# Allegro board LAUNCHPAD.brd
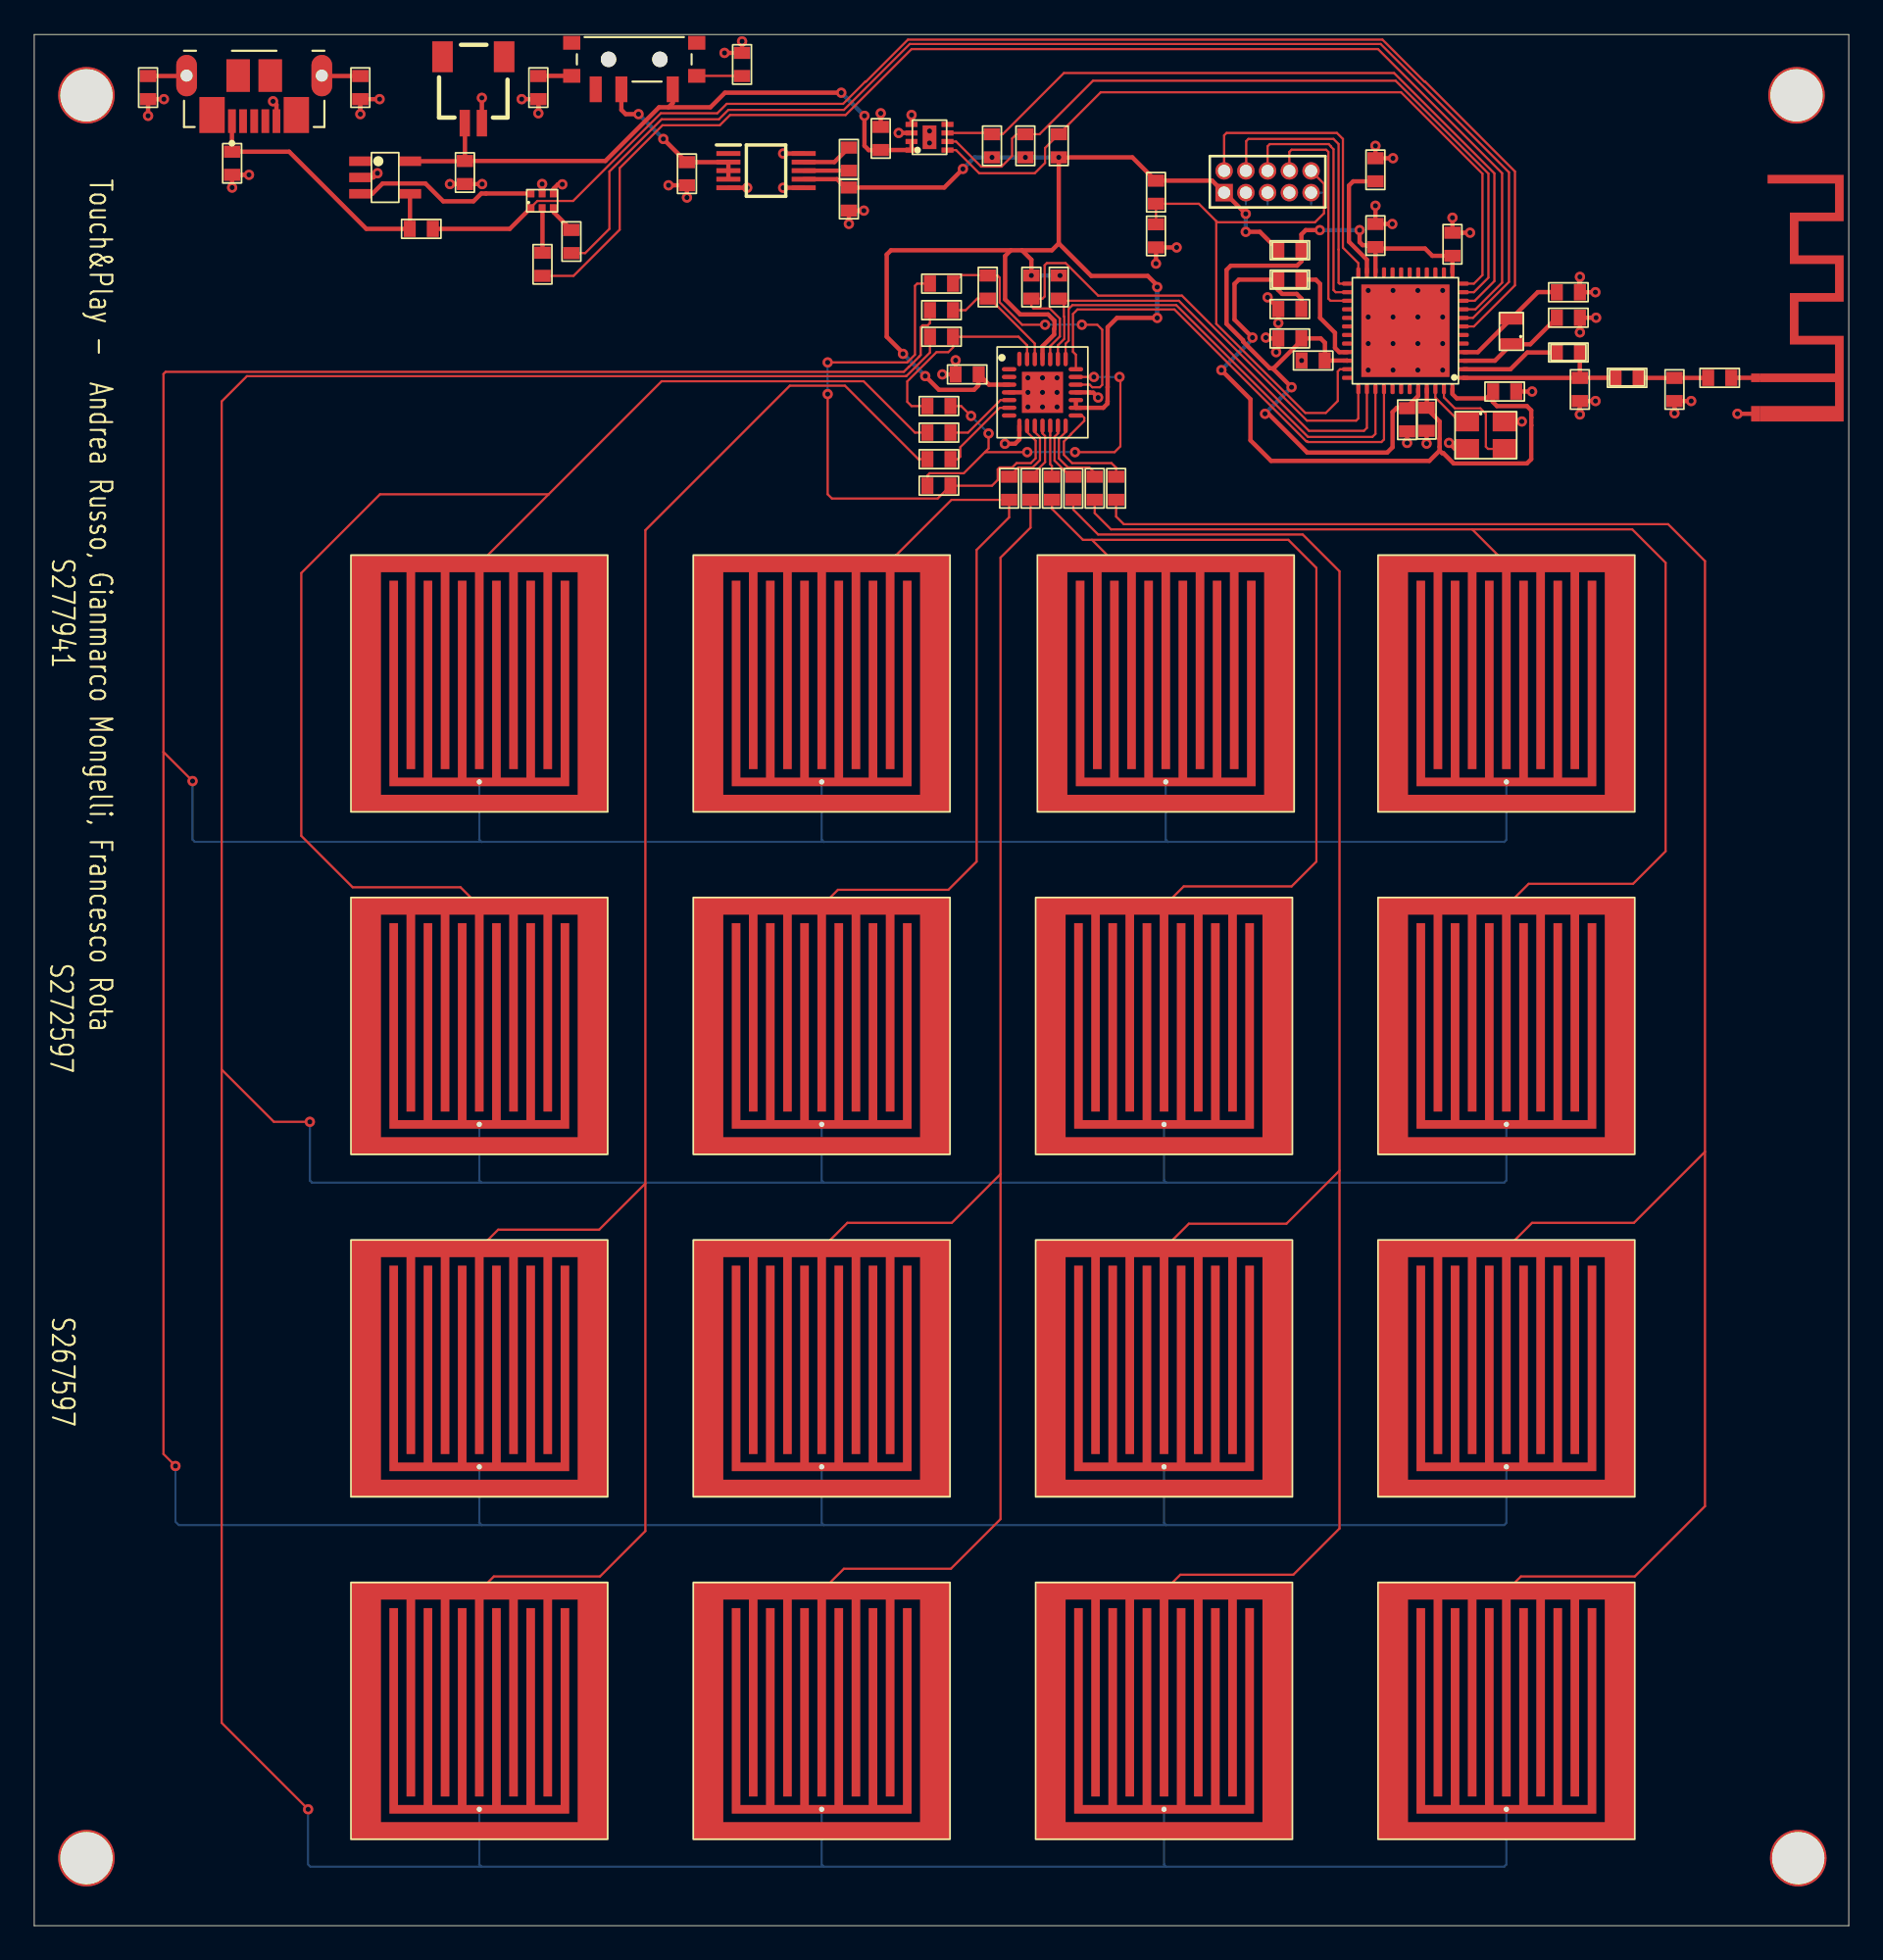
[diagram p0: board, top side]
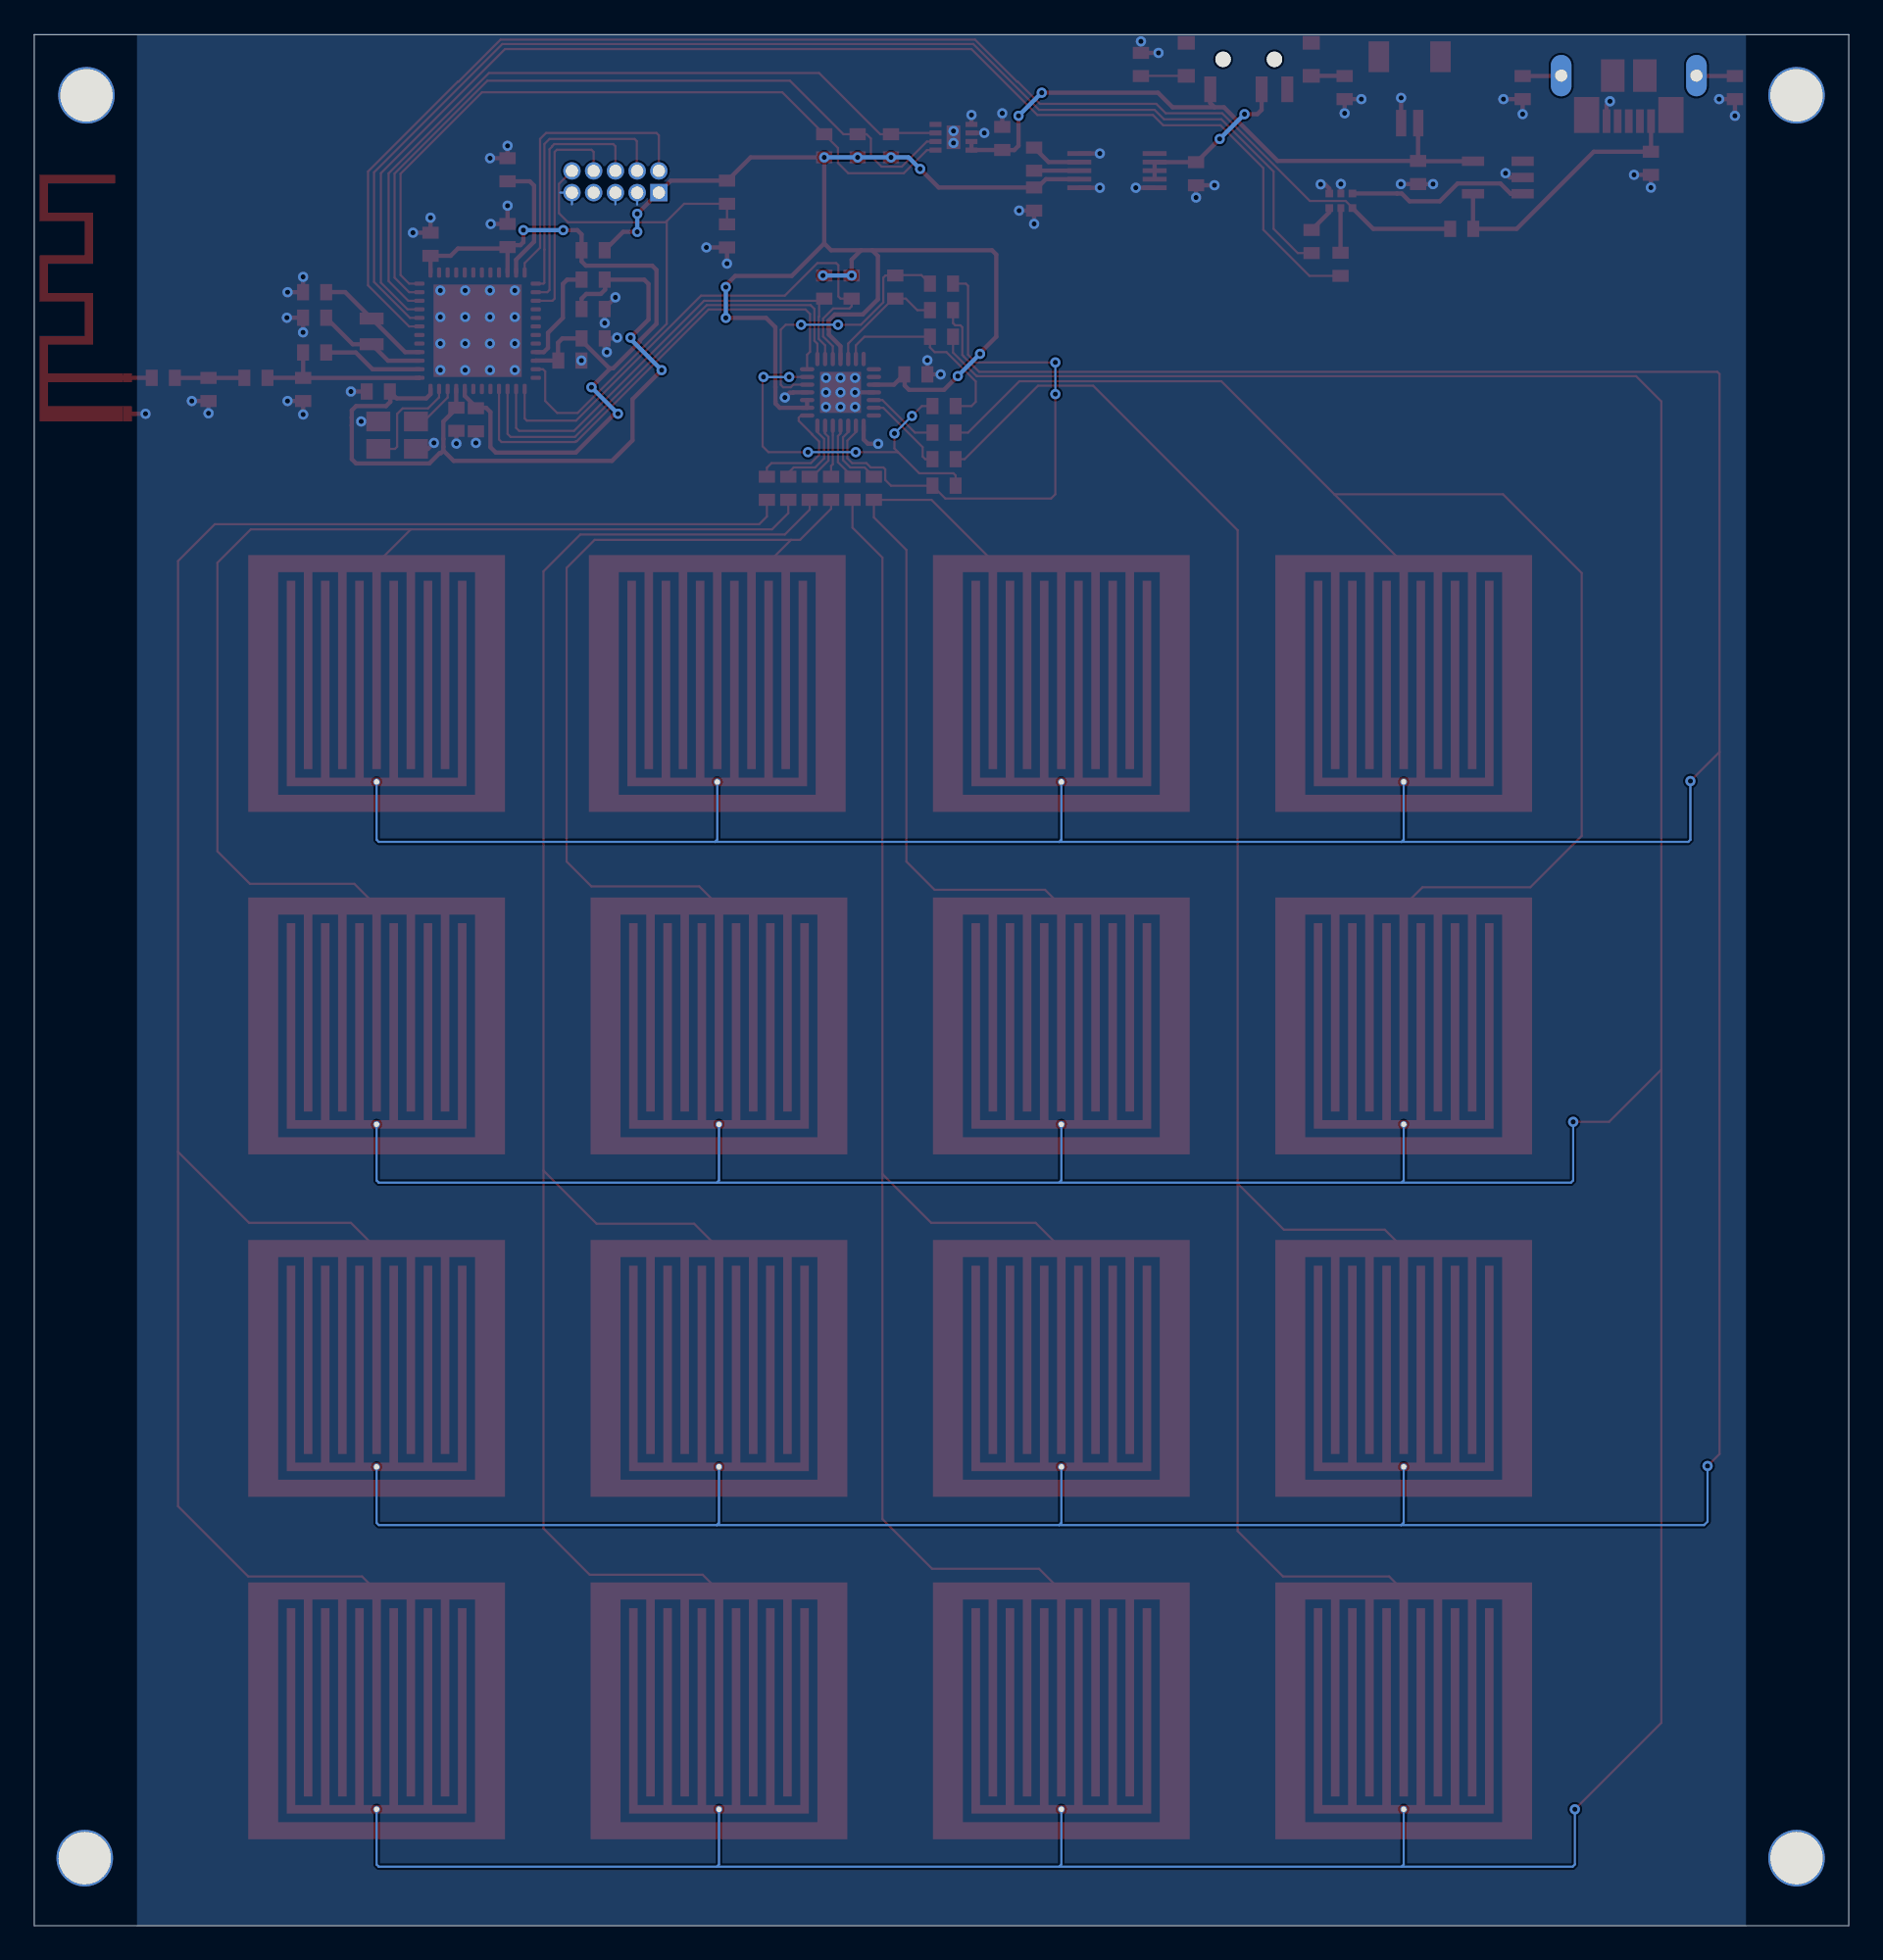
[diagram p1: board, bottom side, seen from below]

Outline 106 x 110.45 mm; copper layers: TOP, BOTTOM. Coordinates in mm from the lower left corner of the outline.
Outline path: 0,110.45 0,0 106,0 106,110.45 0,110.45

## Design rules (mm)
constraint set DEFAULT: min track width 0.127

## Placement (name value [footprint] x y rotation side)
A1  TI AN043  [AN043_PATCH_ANTENNA]  100.8 87.35 270 top
B1  QMatrix_Button  [QMATRIX_BUTTON_TOP]  46 72.55 0 top
B2  QMatrix_Button  [QMATRIX_BUTTON_TOP]  46 32.55 0 top
B3  QMatrix_Button  [QMATRIX_BUTTON_TOP]  66.1 72.55 0 top
B4  QMatrix_Button  [QMATRIX_BUTTON_TOP]  66 32.55 0 top
B5  QMatrix_Button  [QMATRIX_BUTTON_TOP]  86 72.55 0 top
B6  QMatrix_Button  [QMATRIX_BUTTON_TOP]  86 32.55 0 top
B7  QMatrix_Button  [QMATRIX_BUTTON_TOP]  26 72.55 0 top
B8  QMatrix_Button  [QMATRIX_BUTTON_TOP]  26 32.55 0 top
B9  QMatrix_Button  [QMATRIX_BUTTON_TOP]  46 52.55 0 top
B10  QMatrix_Button  [QMATRIX_BUTTON_TOP]  46 12.55 0 top
B11  QMatrix_Button  [QMATRIX_BUTTON_TOP]  66 52.55 0 top
B12  QMatrix_Button  [QMATRIX_BUTTON_TOP]  66 12.55 0 top
B13  QMatrix_Button  [QMATRIX_BUTTON_TOP]  86 52.55 0 top
B14  QMatrix_Button  [QMATRIX_BUTTON_TOP]  86 12.55 0 top
B15  QMatrix_Button  [QMATRIX_BUTTON_TOP]  26 52.55 0 top
B16  QMatrix_Button  [QMATRIX_BUTTON_TOP]  26 12.55 0 top
C1  12pF  [0603_C]  89.62 93.91 180 top
C2  12pF  [0603_C]  89.62 95.4 180 top
C3  1uF  [0603_C]  78.35 102.55 270 top
C4  100nF  [0603_C]  82.85 98.2 270 top
C5  100nF  [0603_C]  80.2 87.95 90 top
C6  10uF  [0603_C]  73.35 94.42 0 top
C7  100nF  [0603_C]  81.34 87.98 90 top
C8  100nF  [0603_C]  85.9 89.6 180 top
C9  100nF  [0603_C]  78.35 98.71 270 top
C10  100nF  [0603_C]  74.71 91.41 0 top
C11  10uF  [0603_C]  73.35 92.7 0 top
C12  12pF  [0603_C]  98.46 90.4 0 top
C13  1.2pF  [0603_C]  90.29 89.72 90 top
C14  1.2pF  [0603_C]  95.82 89.72 90 top
C15  100nF  [0603_C]  65.53 98.69 90 top
C16  330nF  [0603_C]  47.59 103.17 90 top
C17  100nF  [0603_C]  49.45 104.38 270 top
C18  10uF  [0603_C]  38.13 102.32 90 top
C19  10uF  [0603_C]  47.59 100.84 90 top
C20  1u  [0603_C]  25.16 102.39 90 top
C21  1u  [0603_C]  11.56 102.93 90 top
C22  100nF  [0603_C]  54.5 90.6 180 top
C23  4.7 nF  [0603_C]  55.7 95.7 270 top
C24  4.7 nF  [0603_C]  52.85 88.75 180 top
IC1  SC20S-7PF20PPM  [SMD_SC20S-7PF20PPM]  86.29 93.11 90 top
J1  FTSH-105-01-L-D-RA-K  [SAMTEC_FTSH-105-01-L-D-K]  72.05 101.85 0 top
J2  1051640001  [MOLEX_105164-0001]  12.85 109.5 180 top
J3  -  [SM02B-SRSS-TBLFSN]  25.65 107.25 180 top
L1  BLM18EG121SH1D  [0603_L]  73.35 97.85 0 top
L2  10uH  [0603_L]  73.35 96.13 180 top
L3  15nH  [0603_L]  89.62 91.88 0 top
L4  2nH  [0603_L]  93.05 90.4 0 top
LED1  SMLP36  [SMD_SMLP36]  29.67 100.74 0 top
NOREF  -  [unnamed]  103.05 3.95 0 top
NOREF#2  -  [unnamed]  3.05 106.9 0 top
NOREF#3  -  [unnamed]  102.95 106.9 0 top
NOREF#4  -  [unnamed]  3.05 3.95 0 top
R1  100kOhm  [0603_R]  65.53 101.24 90 top
R2  3.3kOhm  [0603_R]  59.85 103.95 270 top
R3  3.3kOhm  [0603_R]  57.9 103.95 270 top
R4  3.3kOhm  [0603_R]  55.95 103.95 270 top
R5  240 Ohm  [0603_R]  22.61 99.1 180 top
R6  33kOhm  [0603_R]  29.45 107.35 90 top
R7  33kOhm  [0603_R]  41.35 108.7 270 top
R8  33k  [0603_R]  19.05 107.35 270 top
R9  270 Ohm  [0603_R]  29.69 97.03 90 top
R10  82 Ohm  [0603_R]  31.38 98.36 90 top
R11  33k  [0603_R]  6.65 107.35 270 top
R13  3.3kOhm  [0603_R]  58.25 95.7 90 top
R14  3.3kOhm  [0603_R]  59.85 95.7 90 top
R15  1kOhm  [0603_R]  52.85 85.65 180 top
R16  1kOhm  [0603_R]  52.85 87.2 180 top
R17  1kOhm  [0603_R]  63.2 83.95 270 top
R18  1kOhm  [0603_R]  61.95 83.95 270 top
R19  1kOhm  [0603_R]  60.7 83.95 270 top
R20  1kOhm  [0603_R]  59.45 83.95 270 top
R21  1kOhm  [0603_R]  58.2 83.95 270 top
R22  1kOhm  [0603_R]  56.95 83.95 270 top
R23  1kOhm  [0603_R]  53 94.35 180 top
R24  1kOhm  [0603_R]  53 92.8 180 top
R25  1MOhm  [0603_R]  52.85 84.1 180 top
R26  1MOhm  [0603_R]  53 95.9 0 top
SW1  PCM12SMTR  [SW_PCM12SMTR]  35.05 109 180 top
U1  TI-CC2640  [SMD_CC2640R2F_RGZ_48]  80.1 93.15 180 top
U2  MAX1759  [SMD_MAX1759]  42.75 102.5 0 top
U3  MAX17048  [SMD_MAX17048]  52.3 104.45 270 top
U4  MAXIM MAX1555  [SMD_MAX1555]  20.5 102.1 270 top
U5  AT42QT2160  [QFN45P400X400X90-29N-D]  58.9 89.55 0 top
Y1  TSX-3225240000MF15X-AC3  [SMD_TSX-3225240000MF15X-AC3]  84.8 87.05 0 top

## Library data of the parts
A1 = Antenna
B1-B16 = QMatrix_Button
C1-C24 = C
IC1 = SC20S-7PF20PPM
J1 = FTSH-105-01-L-D-RA-K
J2 = 1051640001
J3 = SM02B-SRSS-TBLFSN
L1 = FerriteBead
L2-L4 = L
LED1 = SMLP36
R1-R11 R13-R26 = R
SW1 = PCM12SMTR
U1 = TI-CC2640
U2 = MAX1759
U3 = MAX17048
U4 = MAX1555
U5 = AT42QT2160
Y1 = TSX-3225240000MF15X-AC3

## Footprints (pads in the part's own frame, mm; a bottom-side part is the same pattern mirrored in y, then rotated)
0603_C
  rect 0.7x0.95 smd: 1(-0.675,0) 2(0.675,0)
0603_L
  rect 0.7x0.95 smd: 1(-0.675,0) 2(0.675,0)
0603_R
  rect 0.7x0.95 smd: 1(-0.675,0) 2(0.675,0)
AN043_PATCH_ANTENNA
  rect 0.9x0.5 smd: 1(-0.95,-0.25)
  rect 0.5x0.5 smd: 2(-3.05,-0.25)
MOLEX_105164-0001
  rect 0.45x1.38 smd: 1(1.3,4.11) 2(0.65,4.11) 3(0,4.11) 4(-0.65,4.11) 5(-1.3,4.11)
  oval 1.208x2.416 hole 0.7: 6(-3.95,1.45) 11(3.95,1.45)
  rect 1.475x2.1 smd: 7(-2.462,3.75) 10(2.462,3.75)
  rect 1.375x1.9 smd: 8(-0.938,1.45) 9(0.938,1.45)
QFN45P400X400X90-29N-D
  rrect 0.85x0.25 smd: 1(-1.95,1.35) 2(-1.95,0.9) 3(-1.95,0.45) 4(-1.95,0) 5(-1.95,-0.45) 6(-1.95,-0.9) 7(-1.95,-1.35) 15(1.95,-1.35) 16(1.95,-0.9) 17(1.95,-0.45) 18(1.95,0) 19(1.95,0.45) 20(1.95,0.9) 21(1.95,1.35)
  rrect 0.25x0.85 smd: 8(-1.35,-1.95) 9(-0.9,-1.95) 10(-0.45,-1.95) 11(0,-1.95) 12(0.45,-1.95) 13(0.9,-1.95) 14(1.35,-1.95) 22(1.35,1.95) 23(0.9,1.95) 24(0.45,1.95) 25(0,1.95) 26(-0.45,1.95) 27(-0.9,1.95) 28(-1.35,1.95)
  rect 2.4x2.4 smd: 29(0,0)
QMATRIX_BUTTON_TOP
  round 0.5 smd: 1(0,7)
  round 0.4 hole 0.3: 2(0,-5.75)
SAMTEC_FTSH-105-01-L-D-K
  rect 1.016x1.016 hole 0.711: 1(-2.54,-0.635)
  round 1.016 hole 0.711: 2(-2.54,0.635) 3(-1.27,-0.635) 4(-1.27,0.635) 5(0,-0.635) 6(0,0.635) 7(1.27,-0.635) 8(1.27,0.635) 9(2.54,-0.635) 10(2.54,0.635)
SM02B-SRSS-TBLFSN
  rect 0.6x1.55 smd: 1(-0.5,1.975) 2(0.5,1.975)
  rect 1.2x1.8 smd: 3(-1.8,-1.9) 4(1.8,-1.9)
SMD_CC2640R2F_RGZ_48
  rrect 0.6x0.24 smd: 1(-3.4,2.75) 2(-3.4,2.25) 3(-3.4,1.75) 4(-3.4,1.25) 5(-3.4,0.75) 6(-3.4,0.25) 7(-3.4,-0.25) 8(-3.4,-0.75) 9(-3.4,-1.25) 10(-3.4,-1.75) 11(-3.4,-2.25) 12(-3.4,-2.75) 25(3.4,-2.75) 26(3.4,-2.25) 27(3.4,-1.75) 28(3.4,-1.25) 29(3.4,-0.75) 30(3.4,-0.25) 31(3.4,0.25) 32(3.4,0.75) 33(3.4,1.25) 34(3.4,1.75) 35(3.4,2.25) 36(3.4,2.75)
  rrect 0.24x0.6 smd: 13(-2.75,-3.4) 14(-2.25,-3.4) 15(-1.75,-3.4) 16(-1.25,-3.4) 17(-0.75,-3.4) 18(-0.25,-3.4) 19(0.25,-3.4) 20(0.75,-3.4) 21(1.25,-3.4) 22(1.75,-3.4) 23(2.25,-3.4) 24(2.75,-3.4)
  rrect 0.6x0.24 smd rot 90.2: 37(2.75,3.4) 38(2.25,3.4) 39(1.75,3.4) 40(1.25,3.4) 41(0.75,3.4) 42(0.25,3.4) 43(-0.25,3.4) 44(-0.75,3.4) 45(-1.25,3.4) 46(-1.75,3.4) 47(-2.25,3.4) 48(-2.75,3.4)
  rect 5.15x5.4 smd: 49(0,0)
SMD_MAX1555
  rect 0.55x1.3 smd: 1(-0.95,-1.45) 2(0,-1.45) 3(0.95,-1.45) 4(0.95,1.45) 5(-0.95,1.45)
SMD_MAX1759
  rect 1.4x0.28 smd: 1(-2.2,1) 2(-2.2,0.5) 3(-2.2,0) 4(-2.2,-0.5) 5(-2.2,-1) 6(2.2,-1) 7(2.2,-0.5) 8(2.2,0) 9(2.2,0.5) 10(2.2,1)
SMD_MAX17048
  rect 0.3x0.7 smd: 1(0.75,-1.05) 2(0.25,-1.05) 3(-0.25,-1.05) 4(-0.75,-1.05) 5(-0.75,1.05) 6(-0.25,1.05) 7(0.25,1.05) 8(0.75,1.05)
  rect 1.38x0.8 smd: 9(0,0)
SMD_SC20S-7PF20PPM
  rect 0.7x1.4 smd: 1(-0.75,0) 2(0.75,0)
SMD_SMLP36
  rect 0.45x0.45 smd: 1(-0.675,-0.425) 3(0.675,-0.425) 4(0.675,0.425) 6(-0.675,0.425)
  rect 0.4x0.45 smd: 2(0,-0.425) 5(0,0.425)
SMD_TSX-3225240000MF15X-AC3
  rect 1.4x1.15 smd: 1(-1.1,0.8) 2(1.1,0.8) 3(1.1,-0.8) 4(-1.1,-0.8)
SW_PCM12SMTR
  round 0.9 hole 0.9 unplated: (-1.5,0) (1.5,0)
  rect 0.7x1.5 smd: 1(-2.25,1.75) 2(0.75,1.75) 3(2.25,1.75)
  rect 1x0.8 smd: S1(-3.65,0.965) S2(-3.65,-0.965) S3(3.65,-0.965) S4(3.65,0.965)
unnamed
  round 3.302 hole 3.048: (0,0)

## Nets
GND_SIGNAL: A1.1(-) C1.1 C2.1 C3.1 C4.1 C5.1 C6.1 C7.1 C8.1 C9.1 C10.1 C11.1 C13.1 C14.1 C15.1 C17.1 C18.1 C19.1 C20.1 C21.1 C22.2 J1.3 J1.5 J1.9 J2.5 J3.1 LED1.4 LED1.5(CR) R6.1 R7.1 R8.2 R11.2 U1.49 U2.5 U2.6 U2.10 U3.3 U3.4 U3.9 U4.2 U5.4 U5.8 U5.18 U5.29 Y1.2 Y1.4
VDD: C19.2 C22.1 J1.1 L1.1 R1.2 R2.2 R3.2 R4.2 R13.2 R14.2 U2.7 U5.3 U5.16 U5.17 U5.25
VDDR: C6.2 C7.2 C8.2 L2.2 U1.45 U1.48
VDDS: C4.2 C5.2 C9.2 C10.2 C11.2 L1.2(B) U1.13 U1.22 U1.34 U1.44
ALRTN_17048: R2.1 U1.12 U3.8
BAT+: C17.2 C20.2 J3.2 SW1.1 U3.1(VDD) U3.2 U4.5
DCDC_SW: L2.1 U1.33
DCOUPL: C3.2 U1.23
I2CA0_QT2160: U1.40 U5.21
I2CA1_QT2160: U1.39 U5.22
LED_BLUE: LED1.1 R5.1 U1.7
LED_GREEN: R10.1 U1.8
LED_RED: R9.1 U1.9
RF_ANTENNA: A1.2 C12.2
RF_N: L3.1 U1.2
RF_P: C13.2 L3.2 L4.1 U1.1
RST: C15.2 J1.10 R1.1 U1.35
SCL_17048: R4.1 U1.10 U3.6
SCL_QT2160: R13.1 U1.37 U5.24
SDA_17048: R3.1 U1.11 U3.7
SDA_QT2160: R14.1 U1.38 U5.23
SW_OUT: C18.2 SW1.2 U2.2(SHDN_N) U2.3 U2.4
TCKC: J1.4 U1.25
TDI: J1.8 U1.27
TDO: J1.6 U1.26
TMSC: J1.2 U1.24
X0: B1.1 B9.1 R22.2
X1: B2.1 B10.1 R21.2
X2: B3.1 B11.1 R20.2
X3: B4.1 B12.1 R19.2
X4: B5.1 B13.1 R18.2
X5: B6.1 B14.1 R17.2
X6: B7.1 B15.1 R16.2
X7: B8.1 B16.1 R15.2
Y0: B1.2(Y) B2.2(Y) B3.2(Y) B4.2(Y) B5.2(Y) B6.2(Y) B7.2(Y) B8.2(Y) R23.2
Y1: B9.2(Y) B10.2(Y) B11.2(Y) B12.2(Y) B13.2(Y) B14.2(Y) B15.2(Y) B16.2(Y) R24.2
N01048: C16.1 U2.8
N01939: C21.2 J2.1(VBUS) R5.2 U4.4
N007970: C16.2 U2.9
N09779: R15.1 U5.6
N09783: R16.1 U5.5
N09795: R17.1 U5.15
N09799: R18.1 U5.14
N09803: R19.1 U5.13
N09807: R20.1 U5.12
N09811: R21.1 U5.11
N09815: R22.1 U5.10
N11484: C23.2 R23.1 U5.26
N11551: C23.1 R26.2 U5.19
N11691: C24.2 R24.1 U5.27
N11716: C24.1 R25.2 U5.20(Y1B)
N11800: R25.1 R26.1 U5.9
N16165: U1.47 Y1.3
N16180: U1.46 Y1.1
N16326: C1.2 IC1.1 U1.3
N16335: C2.2 IC1.2 U1.4(X32K_Q2)
N20124: LED1.6 U4.3
N20418: LED1.3 R10.2
N20445: LED1.2 R9.2
N41051: R7.2 SW1.S1
N47314: C12.1 C14.2 L4.2
N72888: J2.6 R8.1
N72942: J2.11 R11.1
N408580: R6.2 SW1.S4(SHIELD_4)

Pads without a net: J1 7; J2 2 3 4 7 8 9 10; J3 3 4; SW1 3 S2 S3; U1 5 6 14 15 16 17 18 19 20 21 28 29 30 31 32 36 41 42 43; U2 1; U3 5; U4 1; U5 1 2 7 28

## Via types
v1: diameter 0.6, hole 0.3, TOP to BOTTOM, 121 vias

## Routing (per net, layer and track width the routed paths; a pad name or vN(x,y) marks a point on that pad's centre or on a via; arc(x,y) is an arc through that point)
GND_SIGNAL: length 57.7
  TOP w0.25: v1(66.73,98.02) C15.1 v1(65.53,97.07) ; v1(82.65,86.6) 83,86.25 Y1.4 ; 29.67,101.16 v1(29.67,101.72) ; v1(12.55,102.25) 11.56,102.25 v1(11.56,101.51) ; v1(30.85,101.7) 30.59,101.7 30.34,101.45 30.34,101.16 ; U5.8 57.55,86.8 57.3,86.55 v1(56.7,86.55) ; v1(40.33,109.38) R7.1 v1(41.35,110.05) ; v1(90.29,88.26) C13.1 v1(91.2,89.05) ; v1(79.38,103.22) C3.1 v1(78.35,103.95) ; v1(28.48,106.67) R6.1 v1(29.45,105.85) ; v1(91.2,95.4) 90.3,95.4 v1(90.3,96.29) ; v1(47.59,99.39) C19.1 v1(48.47,100.16) ; v1(72.05,95.1) 72.67,94.47 C6.1 v1(72.67,93.6) ; v1(79.34,99.38) 78.35,99.38 v1(78.35,100.45) ; C5.1 v1(80.2,86.6) ; v1(37.05,101.64) C18.1 v1(38.13,100.93) ; v1(13.95,106.55) 14.15,106.35 J2.5 ; A1.1 v1(99.5,88.3) ; v1(62.15,89.25) 61.87,89.53 61.68,89.53 61.66,89.55 U5.18 ; v1(72.55,91.9) 72.67,92.03 C11.1 72.15,92.7 72.1,92.75 v1(71.95,92.75) ; U3.4 v1(51.25,105.75) ; v1(96.8,89.05) C14.1 v1(95.82,88.33) ; U2.10 v1(43.75,103.5) ; U2.6 v1(43.75,101.5) ; Y1.2 v1(86.9,87.85) ; U3.3 v1(50.5,104.7) ; J3.1 v1(26.15,106.75) ; C17.1 v1(49.45,105.85) ; v1(83.88,98.88) C4.1 v1(82.85,99.75) ; v1(7.58,106.67) R11.2 v1(6.65,105.7) ; v1(26.16,101.72) v1(24.29,101.72) ; v1(20.17,106.67) R8.2 v1(19.05,105.8) ; v1(53.83,91.42) C22.2 v1(53.05,90.6) ; v1(90.3,93.06) 90.3,93.91 v1(91.24,93.91) ; C8.1 v1(87.5,89.6) ; U5.4 v1(58.05,89.55) ; U2.5 v1(41.65,101.5) ; U4.2 19.8,102.1 v1(20.05,102.35) ; C7.1 v1(81.34,86.56)
  BOTTOM w0.127: 74.59,100.53 J1.9 75.28,101.22 ; 72.05,100.53 J1.5 ; 70.78,100.53 J1.3
  vias: v1(52.3,104.81) v1(52.3,104.11) v1(58.05,90.4) v1(58.05,88.7) v1(58.9,90.4) v1(58.9,89.55) v1(58.9,88.7) v1(59.75,90.4) v1(59.75,89.55) v1(59.75,88.7) v1(74.03,91.41) v1(77.93,95.5) v1(77.93,93.95) v1(77.93,92.4) v1(77.93,90.85) v1(79.38,95.5) v1(79.38,93.95) v1(79.38,92.4) v1(79.38,90.85) v1(80.83,95.5) v1(80.83,93.95) v1(80.83,92.4) v1(80.83,90.85) v1(82.28,95.5) v1(82.28,93.95) v1(82.28,92.4) v1(82.28,90.85)
VDD: length 92.1
  TOP w0.25: 57.7,97.85 57.05,97.85 ; 57.7,97.85 58.25,97.3 v1(58.25,96.38) ; 57.7,97.85 59.45,97.85 59.85,98.25 ; 57.05,97.85 50.05,97.85 49.8,97.6 49.8,92.8 50.75,91.85 v1(50.75,91.8) ; 57.05,97.85 56.72,97.52 56.72,94.98 57.6,94.1 59.23,94.1 59.6,93.73 59.6,93.27 59.58,93.25 59.58,92.93 58.9,92.25 U5.25 ; v1(65.6,93.9) 63.25,93.9 62.71,93.36 62.71,89.86 62.7,89.86 62.7,89.02 62.7,89.02 62.7,88.9 62.45,88.65 U5.16 U5.17 ; U5.3 55.77,90 C22.1 55.15,90.57 55.15,89.95 54.9,89.7 52.85,89.7 v1(52.05,90.5) ; L1.1 71.6,98.92 v1(70.78,98.92) ; U2.7 46.9,102 47.39,101.52 C19.2 53.16,101.52 v1(54.25,102.6) ; v1(65.6,95.7) 65.6,95.8 65.05,96.35 61.75,96.35 59.85,98.25 ; 59.85,98.25 v1(59.85,103.28) 64.15,103.28 65.51,101.91 R1.2 68.81,101.91 J1.1 69.53,101.22 v1(70.78,99.97)
  BOTTOM w0.25: v1(52.05,90.5) v1(50.75,91.8) ; v1(59.85,103.28) v1(57.9,103.28) v1(55.95,103.28) 54.92,103.28 v1(54.25,102.6) ; v1(70.78,99.97) v1(70.78,98.92) ; v1(65.6,93.9) v1(65.6,95.7) ; v1(58.25,96.38) v1(59.92,96.38)
VDDR: length 46.8
  TOP w0.25: C8.2 85.2,89.57 ; 85.2,89.57 84.83,89.2 83.1,89.2 82.85,89.45 U1.48 ; 85.2,89.57 85.2,89 85.45,88.75 87.2,88.75 87.45,88.5 87.45,88.08 87.45,88.08 87.45,87.62 87.45,87.62 87.45,85.65 87.2,85.4 82.92,85.4 82.32,86 82.25,86 82.1,86.15 ; 82.1,86.15 82.1,86.37 82.1,86.37 82.1,86.83 82.1,86.83 82.1,87.85 81.34,88.61 C7.2 81.35,88.66 U1.45 ; 82.1,86.15 81.5,85.55 72.25,85.55 71.05,86.75 71.05,89.15 v1(69.35,90.85) ; 74.03,94.42 74.03,95.03 73.75,95.3 72.9,95.3 72.65,95.55 72.65,96.11 L2.2 70.37,96.13 70.12,95.88 70.12,93.8 v1(71.17,92.75)
  BOTTOM w0.25: v1(69.35,90.85) 71.17,92.67 v1(71.17,92.75)
VDDS: length 48.5
  TOP w0.25: 72.4,90.95 74.03,92.58 74.03,92.7 75.15,92.7 75.4,92.45 75.4,91.42 C10.2 76.69,91.41 U1.34 ; 72.4,90.95 72.4,90.9 v1(73.45,89.85) ; 72.4,90.95 72.18,90.95 70.61,92.52 70.61,92.59 69.65,93.56 69.65,96.7 69.9,96.95 73.78,96.95 74.03,97.2 74.03,98.78 74.28,99.03 v1(75.1,99.03) ; C9.2 78.23,98.15 77.6,98.15 77.42,98.32 v1(77.42,99.03) ; C9.2 U1.22 ; C9.2 78.44,97.95 81.25,97.95 81.67,97.53 C4.2 U1.13 ; U1.44 80.85,89.35 80.2,88.7 C5.2 80.17,88.65 79.6,88.65 79.35,88.4 79.35,86.35 79.03,86.03 74.37,86.03 72.1,88.3 v1(71.9,88.3)
  BOTTOM w0.25: v1(73.45,89.85) v1(71.9,88.3) ; v1(75.1,99.03) v1(77.42,99.03)
ALRTN_17048: length 43.5
  TOP w0.127: U3.8 53.85,103.7 55.2,102.35 58.45,102.35 59.05,102.95 59.05,103.82 62.3,107.07 79.84,107.07 84.6,102.32 84.6,96.4 84.1,95.9 U1.12
BAT+: length 37.2
  TOP w0.25: U3.2 U3.1 51.24,103.7 C17.2 49.45,103.7 48.75,103.7 48.5,103.95 v1(48.5,105.7) ; SW1.1 37.3,106.45 37.05,106.2 ; C20.2 33.36,103.06 36.5,106.2 37.05,106.2 ; C20.2 25.14,103.05 U4.5 ; C20.2 25.16,105.27 J3.2 ; 37.05,106.2 39.5,106.2 40.35,107.05 v1(47.14,107.05)
  BOTTOM w0.25: v1(47.14,107.05) 47.15,107.05 v1(48.5,105.7)
DCDC_SW: length 6.1
  TOP w0.25: 74.03,96.13 74.87,96.13 75.12,95.88 75.12,93.9 75.99,93.03 75.99,92.15 76.24,91.9 U1.33
DCOUPL: length 7.2
  TOP w0.25: U1.23 77.85,97.3 76.8,98.35 76.8,101.62 77.05,101.88 C3.2
I2CA0_QT2160: length 27.8
  TOP w0.127: U5.21 60.85,91.75 60.68,91.92 60.68,94.13 60.94,94.39 66.61,94.39 74.3,86.7 74.35,86.7 74.4,86.65 78.7,86.65 78.85,86.8 U1.40
I2CA1_QT2160: length 26.9
  TOP w0.127: U5.22 60.25,92.39 60.43,92.57 60.43,94.43 60.65,94.65 66.71,94.65 74.41,86.95 78.17,86.95 78.35,87.13 U1.39
LED_BLUE: length 81.6
  TOP w0.127: LED1.1 29,100.33 29.39,100.73 31.48,100.73 36.6,105.85 39.9,105.85 40.45,106.4 47.25,106.4 48.55,107.7 48.59,107.7 51.04,110.15 78.76,110.15 81.21,107.7 81.25,107.7 86.5,102.45 86.5,95.8 84.1,93.4 U1.7
  TOP w0.25: R5.1 27.78,99.1 LED1.1
LED_GREEN: length 74.8
  TOP w0.127: R10.1 32.19,97.69 33.6,99.1 33.6,102.45 36.65,105.5 40,105.5 40.55,106.05 47.3,106.05 51.15,109.9 78.65,109.9 86.15,102.4 86.15,96 84.05,93.9 U1.8
LED_RED: length 75.9
  TOP w0.127: R9.1 31.5,96.35 34.2,99.05 34.2,102.65 36.7,105.15 40.05,105.15 40.65,105.75 47.4,105.75 51.25,109.6 78.5,109.6 85.75,102.35 85.75,95.96 84.19,94.4 U1.9
RF_ANTENNA: length 1.8
  TOP w0.25: C12.2 A1.2 100.9,90.4
RF_N: length 5.9
  TOP w0.25: U1.2 86.24,90.9 87.22,91.88 L3.1
RF_P: length 10.4
  TOP w0.25: 90.29,90.39 90.3,90.4 L4.1 ; 90.29,90.39 90.29,91.88 90.3,91.88 ; 90.29,90.39 83.5,90.39 U1.1
RST: length 32.3
  TOP w0.127: 74.59,102.48 75.35,101.73 75.35,100.01 74.82,99.48 69.12,99.48 69.05,99.55 ; 69.05,99.55 69.05,93.56 74.26,88.35 75.45,88.35 76.15,89.05 76.15,90.77 76.28,90.9 U1.35 76.69,90.89 ; 69.05,99.55 68.03,100.56 R1.1 C15.2
SCL_17048: length 44.5
  TOP w0.127: U3.6 55.88,104.7 55.95,104.62 56.58,104.62 60.15,108.2 79.44,108.2 85.3,102.34 85.3,96.05 84.15,94.9 U1.10
SCL_QT2160: length 31.6
  TOP w0.127: U5.24 59.35,92.25 59.92,92.82 59.92,93.86 59.33,94.45 58.38,94.45 58.25,94.58 R13.1 58.9,95.03 59.02,95.15 59.02,96.97 59.15,97.1 60.25,97.1 62.15,95.2 67.05,95.2 74.35,87.9 77.22,87.9 77.35,88.03 U1.37
SDA_17048: length 45
  TOP w0.127: U3.7 53.85,104.2 55.32,102.73 56.5,102.73 57.12,103.36 57.12,104.38 57.38,104.62 58.73,104.62 61.85,107.75 79.53,107.75 84.95,102.33 84.95,96.25 84.1,95.4 U1.11
SDA_QT2160: length 27.2
  TOP w0.127: U1.38 77.85,87.48 77.68,87.3 74.46,87.3 66.87,94.9 59.98,94.9 ; 59.98,94.9 R14.1 ; 59.98,94.9 60.15,94.72 60.15,93.99 60.17,93.96 60.17,92.67 59.8,92.3 U5.23
SW_OUT: length 9.7
  TOP w0.25: U2.4 U2.3 U2.2 40.55,103 C18.2 38.11,103 v1(36.75,104.35) ; v1(35.3,105.8) 34.55,105.8 34.3,106.05 SW1.2
  BOTTOM w0.25: v1(36.75,104.35) v1(35.3,105.8)
TCKC: length 15.9
  TOP w0.127: U1.25 76.25,95.9 76.2,95.95 76.2,97.89 76.2,97.89 76.2,104.05 75.9,104.35 70.93,104.35 70.8,104.22 70.8,102.5 70.78,102.48
TDI: length 13.2
  TOP w0.127: 73.32,102.48 73.32,103.59 73.45,103.72 75.47,103.72 75.6,103.59 75.6,95.03 75.73,94.9 U1.27
TDO: length 14.6
  TOP w0.127: U1.26 76.03,95.4 75.9,95.53 75.9,103.75 75.75,103.9 75.75,103.92 75.62,104.05 72.18,104.05 72.05,103.92 72.05,102.48
TMSC: length 17.4
  TOP w0.127: U1.24 77.35,97.1 76.45,98 76.45,104.35 76.1,104.7 69.65,104.7 69.51,104.56 69.51,102.48
X0: length 44.5
  TOP w0.127: B9.1 46.95,60.5 53.4,60.5 55.05,62.15 55.05,80.35 56.95,82.25 R22.2 53.58,83.28 49.86,79.55 B1.1
X1: length 84.7
  TOP w0.127: 56.45,43.9 56.45,23.75 53.55,20.85 47.3,20.85 B10.1 ; 56.45,43.9 53.6,41.05 47.5,41.05 B2.1 ; 56.45,43.9 56.45,79.9 58.2,81.65 R21.2
X2: length 49.4
  TOP w0.127: B11.1 67.15,60.7 73.45,60.7 74.9,62.15 74.9,79.3 73.26,80.94 61.79,80.94 ; B3.1 63.18,79.55 61.79,80.94 ; 61.79,80.94 61.26,80.94 59.45,82.75 R20.2
X3: length 97.4
  TOP w0.127: B12.1 66.95,20.5 73.55,20.5 76.25,23.2 76.25,44.1 ; 76.25,44.1 73.15,41 67.45,41 B4.1 ; 76.25,44.1 76.25,79.1 74.1,81.25 62.15,81.25 60.7,82.7 R19.2
X4: length 65.6
  TOP w0.127: 84,81.55 B5.1 ; 84,81.55 62.9,81.55 61.95,82.5 R18.2 ; 84,81.55 93.35,81.55 95.3,79.6 95.3,62.75 93.4,60.85 87.3,60.85 B13.1
X5: length 119.2
  TOP w0.127: 97.6,45.2 93.45,41.05 87.5,41.05 B6.1 ; 97.6,45.2 97.6,79.7 95.45,81.85 63.65,81.85 63.2,82.3 R17.2 ; 97.6,45.2 97.6,24.5 93.5,20.4 86.85,20.4 B14.1
X6: length 75.9
  TOP w0.127: 30.05,83.6 36.65,90.2 48.45,90.2 51.45,87.2 R16.2 ; 30.05,83.6 20.2,83.6 15.6,79 15.6,63.65 18.6,60.65 24.9,60.65 B15.1 ; 30.05,83.6 B7.1 26,79.8
X7: length 102.6
  TOP w0.127: 35.7,43.35 35.7,23.05 33.05,20.4 26.85,20.4 B16.1 ; 35.7,43.35 35.7,81.5 44.14,89.94 47.36,89.94 51.65,85.65 R15.2 ; 35.7,43.35 33,40.65 27.1,40.65 B8.1
Y0: length 303.3
  TOP w0.127: 7.55,68.55 7.55,27.55 v1(8.25,26.85) ; 7.55,68.55 7.55,90.62 7.68,90.75 50.8,90.75 51.1,91.05 51.11,91.05 51.7,91.64 51.7,91.65 51.78,91.73 51.78,93.35 51.9,93.47 52.2,93.47 52.33,93.59 R23.2 ; 7.55,68.55 v1(9.25,66.85)
  BOTTOM w0.127: B8.2 26,23.55 26.15,23.4 ; 66.13,23.4 85.87,23.4 86,23.53 B6.2 ; 66.13,23.4 46.13,23.4 ; 66.13,23.4 66,23.53 B4.2 ; B3.2 66.1,63.43 66.23,63.3 ; 46.13,23.4 46,23.53 B2.2 ; 46.13,23.4 26.15,23.4 ; 26.13,63.3 9.38,63.3 9.25,63.43 v1(9.25,66.85) ; 26.13,63.3 26,63.43 B7.2 ; 26.13,63.3 46.13,63.3 ; 66.23,63.3 85.87,63.3 86,63.43 B5.2 ; 66.23,63.3 46.13,63.3 ; 26.15,23.4 8.45,23.4 8.25,23.6 v1(8.25,26.85) ; 46.13,63.3 46,63.43 B1.2
Y1: length 308.1
  TOP w0.127: 10.95,50 10.95,89.02 12.42,90.5 50.91,90.5 50.91,90.5 50.95,90.5 52.33,91.88 R24.2 ; 10.95,50 10.95,11.85 v1(16,6.8) ; 10.95,50 14,46.95 v1(16.1,46.95) ; B11.2 65.95,46.75
  BOTTOM w0.127: B11.2 66,43.53 66.13,43.4 ; B13.2 86,43.53 85.87,43.4 66.13,43.4 ; 46.13,43.4 46,43.53 B9.2 ; 46.13,43.4 26.13,43.4 ; 46.13,43.4 66.13,43.4 ; 46.13,3.45 46,3.58 B10.2 ; 46.13,3.45 66.13,3.45 ; 46.13,3.45 26.13,3.45 ; v1(16,6.8) 16,3.58 16.13,3.45 26.13,3.45 ; B14.2 86,3.58 85.87,3.45 66.13,3.45 ; 66.13,3.45 66,3.58 B12.2 ; 26.13,43.4 26,43.53 B15.2 ; 26.13,43.4 16.23,43.4 16.1,43.53 v1(16.1,46.95) ; 26.13,3.45 26,3.58 B16.2
N01048: length 2.6
  TOP w0.25: C16.1 47.59,102.5 U2.8
N01939: length 16.1
  TOP w0.25: J2.1 11.55,103.61 C21.2 14.9,103.6 19.4,99.1 R5.2 21.95,99.11 U4.4
N007970: length 3
  TOP w0.25: 47.59,103.84 46.74,103 U2.9
N09779: length 5
  TOP w0.127: 53.52,85.65 53.95,85.65 54.1,85.8 54.1,86.35 56.4,88.65 U5.6
N09783: length 4.2
  TOP w0.127: 53.52,87.2 54.55,87.2 56.45,89.1 U5.5
N09795: length 7.1
  TOP w0.127: U5.15 61.21,88.2 61.34,88.07 61.34,87.89 60.57,87.12 60.57,87.1 60.15,86.68 60.15,85.9 60.63,85.42 62.93,85.42 63.2,85.15 R17.1
N09799: length 4.7
  TOP w0.127: U5.14 60.25,87.23 59.86,86.84 59.86,85.69 60.38,85.17 61.63,85.17 61.95,84.85 R18.1
N09803: length 3.6
  TOP w0.127: R19.1 60.54,84.62 59.6,85.57 59.6,86.95 59.81,87.16 59.81,87.59 U5.13
N09807: length 3
  TOP w0.127: U5.12 59.35,87.45 59.35,87.05 59.35,85.35 59.45,85.25 R20.1
N09811: length 3.4
  TOP w0.127: U5.11 58.9,87.15 59.05,87 59.05,85.47 R21.1
N09815: length 4.3
  TOP w0.127: R22.1 57.49,85.17 58.32,85.17 58.75,85.59 58.75,86.93 58.45,87.23 U5.10
N11484: length 7
  TOP w0.127: R23.1 54.41,94.35 55.09,95.03 C23.2 55.83,95.03 58.45,92.4 U5.26
N11551: length 16
  TOP w0.127: v1(61.2,93.5) 62.1,93.5 62.39,93.21 62.39,89.99 62.25,89.85 61.81,89.85 61.66,90 U5.19 ; v1(59.05,93.5) 57.71,93.5 56.4,94.81 56.4,96.25 56.27,96.38 C23.1 55.67,96.4 54.17,96.4 R26.2
  BOTTOM w0.127: v1(59.05,93.5) v1(61.2,93.5)
N11691: length 11.9
  TOP w0.127: U5.27 58,92.3 57.5,92.8 R24.1 53.67,92.17 53.4,91.9 52.71,91.9 51,90.19 51,89 51.25,88.75 C24.2
N11716: length 23.3
  TOP w0.127: v1(60.8,86.06) 63.11,86.06 63.45,86.4 63.45,90.4 v1(63.4,90.45) ; v1(54.73,88.17) 54.15,88.75 53.52,88.75 ; v1(55.75,87.15) 55.75,86.28 55.55,86.07 ; 55.55,86.07 54.3,84.82 52.3,84.82 52.17,84.7 R25.2 ; 55.55,86.07 55.57,86.06 v1(58.01,86.06) ; v1(61.9,90.45) U5.20
  BOTTOM w0.127: v1(54.73,88.17) v1(55.75,87.15) ; v1(58.01,86.06) v1(60.8,86.06) ; v1(63.4,90.45) v1(61.9,90.45)
N11800: length 33.6
  TOP w0.127: R26.1 51.58,95.9 51.45,95.77 51.45,91.75 51,91.3 v1(46.35,91.3) ; v1(46.35,89.45) 46.35,83.6 46.6,83.35 52.77,83.35 53.52,84.1 55.95,84.1 56.28,84.44 56.28,85.05 56.4,85.17 57.13,85.17 57.39,85.42 58.22,85.42 58.5,85.7 58.5,86.73 58,87.23 U5.9
  BOTTOM w0.127: v1(46.35,89.45) v1(46.35,91.3)
N16165: length 6.4
  TOP w0.127: Y1.3 84.93,86.25 84.8,86.38 84.8,88.29 84.48,88.62 82.99,88.62 82.35,89.26 U1.47
N16180: length 2.9
  TOP w0.127: U1.46 81.85,89.25 83.25,87.85 Y1.1
N16326: length 6.5
  TOP w0.25: U1.3 85.33,91.4 IC1.1 87.39,92.36 C1.2
N16335: length 6.9
  TOP w0.25: U1.4 84.33,91.9 IC1.2 87.84,95.41 88.94,95.41 C2.2
N20124: length 10.8
  TOP w0.25: 29,101.16 26.4,101.16 26.39,101.16 26.11,101.16 25.66,100.71 23.89,100.71 22.85,101.75 20.35,101.75 19.75,101.15 U4.3
N20418: length 1.7
  TOP w0.25: 30.34,100.31 30.34,100.07 R10.2
N20445: length 2.6
  TOP w0.25: LED1.2 29.69,100.29 29.69,97.7
N41051: length 2.7
  TOP w0.127: SW1.S1 41.34,108.03 R7.2
N47314: length 4.1
  TOP w0.25: 97.78,90.4 97.78,90.39 93.73,90.39 L4.2
N72888: length 2.3
  TOP w0.25: J2.6 16.83,108.03 19.05,108.03
N72942: length 2.3
  TOP w0.25: J2.11 8.88,108.03 6.65,108.03
N408580: length 2
  TOP w0.25: 29.45,108.03 29.46,108.03 SW1.S4

## Copper pours and planes (outline as drawn; the poured copper is in the pictures)
GND_SIGNAL on BOTTOM: 6,110.45 6,0 100,0 100,110.45
RF_ANTENNA on TOP (solid shape): 105.7,99.55 103.06,99.55 103.06,97.55 105.7,97.55 105.7,94.85 103.06,94.85 103.06,92.85 105.7,92.85 105.7,87.85 100.8,87.85 100.8,88.75 105.2,88.75 105.2,90.15 100.8,90.15 100.8,90.65 105.2,90.65 105.2,92.35 102.56,92.35 102.56,95.35 105.2,95.35 105.2,97.05 102.56,97.05 102.56,100.05 105.2,100.05 105.2,101.75 101.26,101.75 101.26,102.25 105.7,102.25
X0 on TOP (solid shape): 53.5,65.05 38.5,65.05 38.5,66.05 51.75,66.05 51.75,79.05 50.25,79.05 50.25,67.55 49.75,67.55 49.75,79.05 48.25,79.05 48.25,67.55 47.75,67.55 47.75,79.05 46.25,79.05 46.25,67.55 45.75,67.55 45.75,79.05 44.25,79.05 44.25,67.55 43.75,67.55 43.75,79.05 42.25,79.05 42.25,67.55 41.75,67.55 41.75,79.05 40.25,79.05 40.25,66.05 38.5,66.05 38.5,80.05 53.5,80.05
X0 on TOP (solid shape): 53.5,45.05 38.5,45.05 38.5,46.05 51.75,46.05 51.75,59.05 50.25,59.05 50.25,47.55 49.75,47.55 49.75,59.05 48.25,59.05 48.25,47.55 47.75,47.55 47.75,59.05 46.25,59.05 46.25,47.55 45.75,47.55 45.75,59.05 44.25,59.05 44.25,47.55 43.75,47.55 43.75,59.05 42.25,59.05 42.25,47.55 41.75,47.55 41.75,59.05 40.25,59.05 40.25,46.05 38.5,46.05 38.5,60.05 53.5,60.05
X1 on TOP (solid shape): 53.5,25.05 38.5,25.05 38.5,26.05 51.75,26.05 51.75,39.05 50.25,39.05 50.25,27.55 49.75,27.55 49.75,39.05 48.25,39.05 48.25,27.55 47.75,27.55 47.75,39.05 46.25,39.05 46.25,27.55 45.75,27.55 45.75,39.05 44.25,39.05 44.25,27.55 43.75,27.55 43.75,39.05 42.25,39.05 42.25,27.55 41.75,27.55 41.75,39.05 40.25,39.05 40.25,26.05 38.5,26.05 38.5,40.05 53.5,40.05
X1 on TOP (solid shape): 53.5,5.05 38.5,5.05 38.5,6.05 51.75,6.05 51.75,19.05 50.25,19.05 50.25,7.55 49.75,7.55 49.75,19.05 48.25,19.05 48.25,7.55 47.75,7.55 47.75,19.05 46.25,19.05 46.25,7.55 45.75,7.55 45.75,19.05 44.25,19.05 44.25,7.55 43.75,7.55 43.75,19.05 42.25,19.05 42.25,7.55 41.75,7.55 41.75,19.05 40.25,19.05 40.25,6.05 38.5,6.05 38.5,20.05 53.5,20.05
X2 on TOP (solid shape): 73.5,45.05 58.5,45.05 58.5,46.05 71.75,46.05 71.75,59.05 70.25,59.05 70.25,47.55 69.75,47.55 69.75,59.05 68.25,59.05 68.25,47.55 67.75,47.55 67.75,59.05 66.25,59.05 66.25,47.55 65.75,47.55 65.75,59.05 64.25,59.05 64.25,47.55 63.75,47.55 63.75,59.05 62.25,59.05 62.25,47.55 61.75,47.55 61.75,59.05 60.25,59.05 60.25,46.05 58.5,46.05 58.5,60.05 73.5,60.05
X2 on TOP (solid shape): 73.6,65.05 58.6,65.05 58.6,66.05 71.85,66.05 71.85,79.05 70.35,79.05 70.35,67.55 69.85,67.55 69.85,79.05 68.35,79.05 68.35,67.55 67.85,67.55 67.85,79.05 66.35,79.05 66.35,67.55 65.85,67.55 65.85,79.05 64.35,79.05 64.35,67.55 63.85,67.55 63.85,79.05 62.35,79.05 62.35,67.55 61.85,67.55 61.85,79.05 60.35,79.05 60.35,66.05 58.6,66.05 58.6,80.05 73.6,80.05
X3 on TOP (solid shape): 73.5,25.05 58.5,25.05 58.5,26.05 71.75,26.05 71.75,39.05 70.25,39.05 70.25,27.55 69.75,27.55 69.75,39.05 68.25,39.05 68.25,27.55 67.75,27.55 67.75,39.05 66.25,39.05 66.25,27.55 65.75,27.55 65.75,39.05 64.25,39.05 64.25,27.55 63.75,27.55 63.75,39.05 62.25,39.05 62.25,27.55 61.75,27.55 61.75,39.05 60.25,39.05 60.25,26.05 58.5,26.05 58.5,40.05 73.5,40.05
X3 on TOP (solid shape): 73.5,5.05 58.5,5.05 58.5,6.05 71.75,6.05 71.75,19.05 70.25,19.05 70.25,7.55 69.75,7.55 69.75,19.05 68.25,19.05 68.25,7.55 67.75,7.55 67.75,19.05 66.25,19.05 66.25,7.55 65.75,7.55 65.75,19.05 64.25,19.05 64.25,7.55 63.75,7.55 63.75,19.05 62.25,19.05 62.25,7.55 61.75,7.55 61.75,19.05 60.25,19.05 60.25,6.05 58.5,6.05 58.5,20.05 73.5,20.05
X4 on TOP (solid shape): 93.5,65.05 78.5,65.05 78.5,66.05 91.75,66.05 91.75,79.05 90.25,79.05 90.25,67.55 89.75,67.55 89.75,79.05 88.25,79.05 88.25,67.55 87.75,67.55 87.75,79.05 86.25,79.05 86.25,67.55 85.75,67.55 85.75,79.05 84.25,79.05 84.25,67.55 83.75,67.55 83.75,79.05 82.25,79.05 82.25,67.55 81.75,67.55 81.75,79.05 80.25,79.05 80.25,66.05 78.5,66.05 78.5,80.05 93.5,80.05
X4 on TOP (solid shape): 93.5,45.05 78.5,45.05 78.5,46.05 91.75,46.05 91.75,59.05 90.25,59.05 90.25,47.55 89.75,47.55 89.75,59.05 88.25,59.05 88.25,47.55 87.75,47.55 87.75,59.05 86.25,59.05 86.25,47.55 85.75,47.55 85.75,59.05 84.25,59.05 84.25,47.55 83.75,47.55 83.75,59.05 82.25,59.05 82.25,47.55 81.75,47.55 81.75,59.05 80.25,59.05 80.25,46.05 78.5,46.05 78.5,60.05 93.5,60.05
X5 on TOP (solid shape): 93.5,25.05 78.5,25.05 78.5,26.05 91.75,26.05 91.75,39.05 90.25,39.05 90.25,27.55 89.75,27.55 89.75,39.05 88.25,39.05 88.25,27.55 87.75,27.55 87.75,39.05 86.25,39.05 86.25,27.55 85.75,27.55 85.75,39.05 84.25,39.05 84.25,27.55 83.75,27.55 83.75,39.05 82.25,39.05 82.25,27.55 81.75,27.55 81.75,39.05 80.25,39.05 80.25,26.05 78.5,26.05 78.5,40.05 93.5,40.05
X5 on TOP (solid shape): 93.5,5.05 78.5,5.05 78.5,6.05 91.75,6.05 91.75,19.05 90.25,19.05 90.25,7.55 89.75,7.55 89.75,19.05 88.25,19.05 88.25,7.55 87.75,7.55 87.75,19.05 86.25,19.05 86.25,7.55 85.75,7.55 85.75,19.05 84.25,19.05 84.25,7.55 83.75,7.55 83.75,19.05 82.25,19.05 82.25,7.55 81.75,7.55 81.75,19.05 80.25,19.05 80.25,6.05 78.5,6.05 78.5,20.05 93.5,20.05
X6 on TOP (solid shape): 33.5,65.05 18.5,65.05 18.5,66.05 31.75,66.05 31.75,79.05 30.25,79.05 30.25,67.55 29.75,67.55 29.75,79.05 28.25,79.05 28.25,67.55 27.75,67.55 27.75,79.05 26.25,79.05 26.25,67.55 25.75,67.55 25.75,79.05 24.25,79.05 24.25,67.55 23.75,67.55 23.75,79.05 22.25,79.05 22.25,67.55 21.75,67.55 21.75,79.05 20.25,79.05 20.25,66.05 18.5,66.05 18.5,80.05 33.5,80.05
X6 on TOP (solid shape): 33.5,45.05 18.5,45.05 18.5,46.05 31.75,46.05 31.75,59.05 30.25,59.05 30.25,47.55 29.75,47.55 29.75,59.05 28.25,59.05 28.25,47.55 27.75,47.55 27.75,59.05 26.25,59.05 26.25,47.55 25.75,47.55 25.75,59.05 24.25,59.05 24.25,47.55 23.75,47.55 23.75,59.05 22.25,59.05 22.25,47.55 21.75,47.55 21.75,59.05 20.25,59.05 20.25,46.05 18.5,46.05 18.5,60.05 33.5,60.05
X7 on TOP (solid shape): 33.5,25.05 18.5,25.05 18.5,26.05 31.75,26.05 31.75,39.05 30.25,39.05 30.25,27.55 29.75,27.55 29.75,39.05 28.25,39.05 28.25,27.55 27.75,27.55 27.75,39.05 26.25,39.05 26.25,27.55 25.75,27.55 25.75,39.05 24.25,39.05 24.25,27.55 23.75,27.55 23.75,39.05 22.25,39.05 22.25,27.55 21.75,27.55 21.75,39.05 20.25,39.05 20.25,26.05 18.5,26.05 18.5,40.05 33.5,40.05
X7 on TOP (solid shape): 33.5,5.05 18.5,5.05 18.5,6.05 31.75,6.05 31.75,19.05 30.25,19.05 30.25,7.55 29.75,7.55 29.75,19.05 28.25,19.05 28.25,7.55 27.75,7.55 27.75,19.05 26.25,19.05 26.25,7.55 25.75,7.55 25.75,19.05 24.25,19.05 24.25,7.55 23.75,7.55 23.75,19.05 22.25,19.05 22.25,7.55 21.75,7.55 21.75,19.05 20.25,19.05 20.25,6.05 18.5,6.05 18.5,20.05 33.5,20.05
Y0 on TOP (solid shape): 21.25,67.05 22.75,67.05 22.75,78.55 23.25,78.55 23.25,67.05 24.75,67.05 24.75,78.55 25.25,78.55 25.25,67.05 26.75,67.05 26.75,78.55 27.25,78.55 27.25,67.05 28.75,67.05 28.75,78.55 29.25,78.55 29.25,67.05 30.75,67.05 30.75,78.55 31.25,78.55 31.25,66.55 20.75,66.55 20.75,78.55 21.25,78.55
Y0 on TOP (solid shape): 21.25,27.05 22.75,27.05 22.75,38.55 23.25,38.55 23.25,27.05 24.75,27.05 24.75,38.55 25.25,38.55 25.25,27.05 26.75,27.05 26.75,38.55 27.25,38.55 27.25,27.05 28.75,27.05 28.75,38.55 29.25,38.55 29.25,27.05 30.75,27.05 30.75,38.55 31.25,38.55 31.25,26.55 20.75,26.55 20.75,38.55 21.25,38.55
Y0 on TOP (solid shape): 41.25,67.05 42.75,67.05 42.75,78.55 43.25,78.55 43.25,67.05 44.75,67.05 44.75,78.55 45.25,78.55 45.25,67.05 46.75,67.05 46.75,78.55 47.25,78.55 47.25,67.05 48.75,67.05 48.75,78.55 49.25,78.55 49.25,67.05 50.75,67.05 50.75,78.55 51.25,78.55 51.25,66.55 40.75,66.55 40.75,78.55 41.25,78.55
Y0 on TOP (solid shape): 41.25,27.05 42.75,27.05 42.75,38.55 43.25,38.55 43.25,27.05 44.75,27.05 44.75,38.55 45.25,38.55 45.25,27.05 46.75,27.05 46.75,38.55 47.25,38.55 47.25,27.05 48.75,27.05 48.75,38.55 49.25,38.55 49.25,27.05 50.75,27.05 50.75,38.55 51.25,38.55 51.25,26.55 40.75,26.55 40.75,38.55 41.25,38.55
Y0 on TOP (solid shape): 61.25,27.05 62.75,27.05 62.75,38.55 63.25,38.55 63.25,27.05 64.75,27.05 64.75,38.55 65.25,38.55 65.25,27.05 66.75,27.05 66.75,38.55 67.25,38.55 67.25,27.05 68.75,27.05 68.75,38.55 69.25,38.55 69.25,27.05 70.75,27.05 70.75,38.55 71.25,38.55 71.25,26.55 60.75,26.55 60.75,38.55 61.25,38.55
Y0 on TOP (solid shape): 61.35,67.05 62.85,67.05 62.85,78.55 63.35,78.55 63.35,67.05 64.85,67.05 64.85,78.55 65.35,78.55 65.35,67.05 66.85,67.05 66.85,78.55 67.35,78.55 67.35,67.05 68.85,67.05 68.85,78.55 69.35,78.55 69.35,67.05 70.85,67.05 70.85,78.55 71.35,78.55 71.35,66.55 60.85,66.55 60.85,78.55 61.35,78.55
Y0 on TOP (solid shape): 81.25,67.05 82.75,67.05 82.75,78.55 83.25,78.55 83.25,67.05 84.75,67.05 84.75,78.55 85.25,78.55 85.25,67.05 86.75,67.05 86.75,78.55 87.25,78.55 87.25,67.05 88.75,67.05 88.75,78.55 89.25,78.55 89.25,67.05 90.75,67.05 90.75,78.55 91.25,78.55 91.25,66.55 80.75,66.55 80.75,78.55 81.25,78.55
Y0 on TOP (solid shape): 81.25,27.05 82.75,27.05 82.75,38.55 83.25,38.55 83.25,27.05 84.75,27.05 84.75,38.55 85.25,38.55 85.25,27.05 86.75,27.05 86.75,38.55 87.25,38.55 87.25,27.05 88.75,27.05 88.75,38.55 89.25,38.55 89.25,27.05 90.75,27.05 90.75,38.55 91.25,38.55 91.25,26.55 80.75,26.55 80.75,38.55 81.25,38.55
Y1 on TOP (solid shape): 21.25,47.05 22.75,47.05 22.75,58.55 23.25,58.55 23.25,47.05 24.75,47.05 24.75,58.55 25.25,58.55 25.25,47.05 26.75,47.05 26.75,58.55 27.25,58.55 27.25,47.05 28.75,47.05 28.75,58.55 29.25,58.55 29.25,47.05 30.75,47.05 30.75,58.55 31.25,58.55 31.25,46.55 20.75,46.55 20.75,58.55 21.25,58.55
Y1 on TOP (solid shape): 21.25,7.05 22.75,7.05 22.75,18.55 23.25,18.55 23.25,7.05 24.75,7.05 24.75,18.55 25.25,18.55 25.25,7.05 26.75,7.05 26.75,18.55 27.25,18.55 27.25,7.05 28.75,7.05 28.75,18.55 29.25,18.55 29.25,7.05 30.75,7.05 30.75,18.55 31.25,18.55 31.25,6.55 20.75,6.55 20.75,18.55 21.25,18.55
Y1 on TOP (solid shape): 41.25,47.05 42.75,47.05 42.75,58.55 43.25,58.55 43.25,47.05 44.75,47.05 44.75,58.55 45.25,58.55 45.25,47.05 46.75,47.05 46.75,58.55 47.25,58.55 47.25,47.05 48.75,47.05 48.75,58.55 49.25,58.55 49.25,47.05 50.75,47.05 50.75,58.55 51.25,58.55 51.25,46.55 40.75,46.55 40.75,58.55 41.25,58.55
Y1 on TOP (solid shape): 41.25,7.05 42.75,7.05 42.75,18.55 43.25,18.55 43.25,7.05 44.75,7.05 44.75,18.55 45.25,18.55 45.25,7.05 46.75,7.05 46.75,18.55 47.25,18.55 47.25,7.05 48.75,7.05 48.75,18.55 49.25,18.55 49.25,7.05 50.75,7.05 50.75,18.55 51.25,18.55 51.25,6.55 40.75,6.55 40.75,18.55 41.25,18.55
Y1 on TOP (solid shape): 61.25,47.05 62.75,47.05 62.75,58.55 63.25,58.55 63.25,47.05 64.75,47.05 64.75,58.55 65.25,58.55 65.25,47.05 66.75,47.05 66.75,58.55 67.25,58.55 67.25,47.05 68.75,47.05 68.75,58.55 69.25,58.55 69.25,47.05 70.75,47.05 70.75,58.55 71.25,58.55 71.25,46.55 60.75,46.55 60.75,58.55 61.25,58.55
Y1 on TOP (solid shape): 61.25,7.05 62.75,7.05 62.75,18.55 63.25,18.55 63.25,7.05 64.75,7.05 64.75,18.55 65.25,18.55 65.25,7.05 66.75,7.05 66.75,18.55 67.25,18.55 67.25,7.05 68.75,7.05 68.75,18.55 69.25,18.55 69.25,7.05 70.75,7.05 70.75,18.55 71.25,18.55 71.25,6.55 60.75,6.55 60.75,18.55 61.25,18.55
Y1 on TOP (solid shape): 81.25,47.05 82.75,47.05 82.75,58.55 83.25,58.55 83.25,47.05 84.75,47.05 84.75,58.55 85.25,58.55 85.25,47.05 86.75,47.05 86.75,58.55 87.25,58.55 87.25,47.05 88.75,47.05 88.75,58.55 89.25,58.55 89.25,47.05 90.75,47.05 90.75,58.55 91.25,58.55 91.25,46.55 80.75,46.55 80.75,58.55 81.25,58.55
Y1 on TOP (solid shape): 81.25,7.05 82.75,7.05 82.75,18.55 83.25,18.55 83.25,7.05 84.75,7.05 84.75,18.55 85.25,18.55 85.25,7.05 86.75,7.05 86.75,18.55 87.25,18.55 87.25,7.05 88.75,7.05 88.75,18.55 89.25,18.55 89.25,7.05 90.75,7.05 90.75,18.55 91.25,18.55 91.25,6.55 80.75,6.55 80.75,18.55 81.25,18.55

## Text on the board
Ref Des/Silkscreen Top: S272597 | S277941 | S267597 | Touch&Play -  Andrea Russo, Gianmarco Mongelli, Francesco Rota
